# EAGLE board dongle (EAGLE 9.6.2)
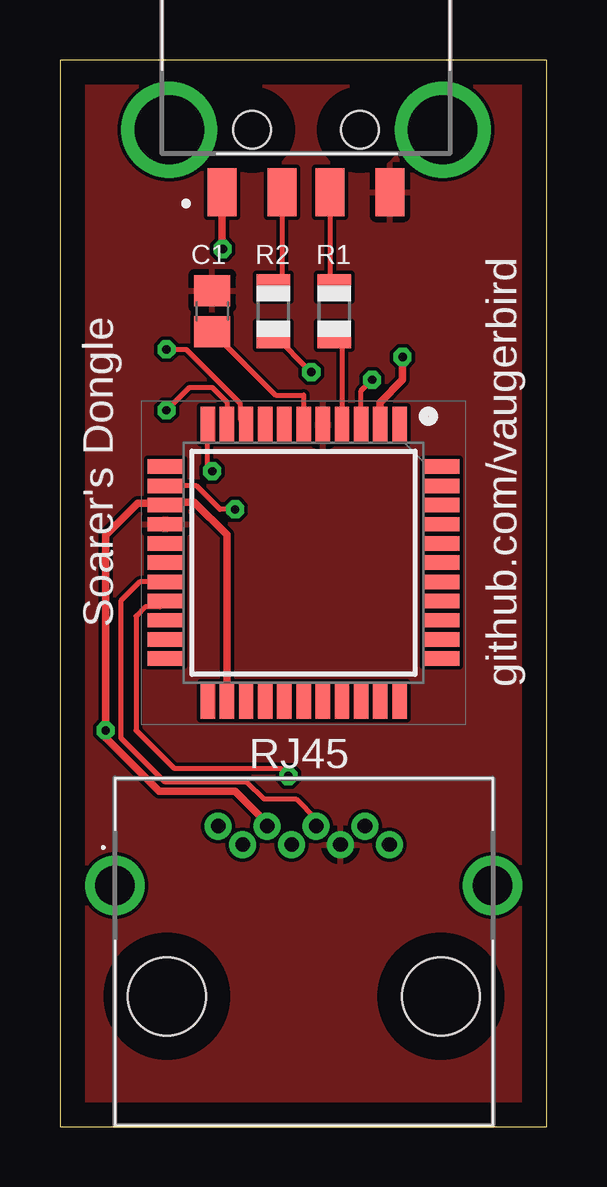
[diagram p0: board, top side]
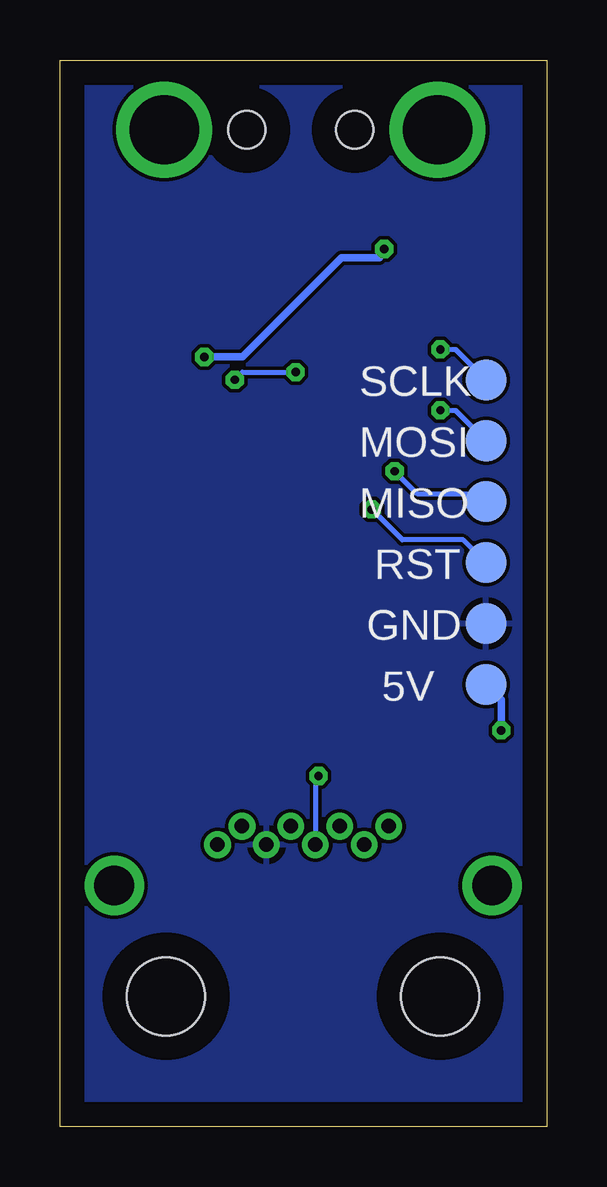
[diagram p1: board, bottom side, seen from below]

Size 20.31 x 44.44 mm. Coordinates in mm from the lower left corner, seen from the top.
Outline: 0,0 20.31,0 20.31,44.44 0,44.44 0,0
Copper layers (1*16): Top 0.035mm / dielectric 1.5mm / Bottom 0.035mm
Design rules "default": minimum track width 6mil, minimum drill 0.35mm, track to track 6mil, track to pad 6mil, pad to pad 6mil, via to via 6mil, smd to smd 6mil, copper to edge 40mil, drill to drill 6mil, minimum pad ring 10mil, minimum via ring 8mil, stop-mask expansion 4mil, vias tented up to drill 0mil, thermal gap 10mil

## Footprints (pad centres in the part's own frame; a part is rotated, then mirrored left to right if it is on the bottom)
TP17R = smd 1.7 x 1.7: TP 0,0
C0805 = smd 1.3 x 1.5: 1 -0.85,0; 2 0.85,0
QFP80P1200X1200X120-44N = smd 1.5 x 0.6: 1 -5.75,4; 2 -5.75,3.2; 3 -5.75,2.4; 4 -5.75,1.6; 5 -5.75,0.8; 6 -5.75,0; 7 -5.75,-0.8; 8 -5.75,-1.6; 9 -5.75,-2.4; 10 -5.75,-3.2; 11 -5.75,-4; 23 5.75,-4; 24 5.75,-3.2; 25 5.75,-2.4; 26 5.75,-1.6; 27 5.75,-0.8; 28 5.75,0; 29 5.75,0.8; 30 5.75,1.6; 31 5.75,2.4; 32 5.75,3.2; 33 5.75,4 | smd 0.6 x 1.5: 12 -4,-5.75; 13 -3.2,-5.75; 14 -2.4,-5.75; 15 -1.6,-5.75; 16 -0.8,-5.75; 17 0,-5.75; 18 0.8,-5.75; 19 1.6,-5.75; 20 2.4,-5.75; 21 3.2,-5.75; 22 4,-5.75; 34 4,5.75; 35 3.2,5.75; 36 2.4,5.75; 37 1.6,5.75; 38 0.8,5.75; 39 0,5.75; 40 -0.8,5.75; 41 -1.6,5.75; 42 -2.4,5.75; 43 -3.2,5.75; 44 -4,5.75
KUSBXSMT2AP5SB = smd 1.2 x 2: 1 3.5,10.125; 2 1,10.125; 3 -1,10.125; 4 -3.5,10.125 | drill 2.89 pad 4: MH1 -5.7,7.525; MH2 5.7,7.525 | hole 1.55: -2.25,7.525; 2.25,7.525
SS60300046 = drill 0.61 pad 1: 1 0,0; 2 1.02,-0.77; 3 -1.02,-0.77; 4 -3.06,-0.77; 5 -2.04,0; 6 -4.08,0; 7 -6.12,0; 8 -5.1,-0.77 | drill 1.65 pad 2.475: MH1 -10.425,1.7; MH2 5.325,1.7 | hole 3.25: 3.165,6.32; -8.265,6.32
R0805 = smd 1.1 x 1.4: 1 -1,0; 2 1,0

## Placement (x,y rotation side)
5V  TPTP17R  [TP17R]  2.54,18.41 0 bottom
C1  1uF  [C0805]  6.35,33.97 90 top
GND  TPTP17R  [TP17R]  2.54,20.95 0 bottom
IC1  ATMEGA32U4-AUR  [QFP80P1200X1200X120-44N]  10.16,23.5 270 top
J1  KUSBX-SMT2AP5S-B  [KUSBXSMT2AP5SB]  10.26,49.06 180 top
J2  SS-60300-046  [SS60300046]  7.62,11.75 180 top
MISO  TPTP17R  [TP17R]  2.54,26.04 0 bottom
MOSI  TPTP17R  [TP17R]  2.54,28.57 0 bottom
R1  22Ω  [R0805]  11.43,33.97 270 top
R2  22Ω  [R0805]  8.89,33.97 270 top
RST  TPTP17R  [TP17R]  2.54,23.5 0 bottom
SCLK  TPTP17R  [TP17R]  2.54,31.11 0 bottom

## Library data of the parts
5V GND MISO MOSI RST SCLK = testpad
C1 R1 R2 = adafruit
IC1 = SamacSys_Parts; DESCRIPTION: 8-bit Microcontrollers - MCU USB 32K Flash 16 MHz; HEIGHT: 1.2mm; MANUFACTURER_NAME: Microchip; MANUFACTURER_PART_NUMBER: ATMEGA32U4-AUR; MOUSER_PART_NUMBER: 556-ATMEGA32U4-AUR; MOUSER_PRICE-STOCK: https://www.mouser.co.uk/ProductDetail/Microchip-Technology-Atmel/ATMEGA32U4-AUR?qs=rBGENRD8NwIbVIAimLns%252BA%3D%3D
J1 = SamacSys_Parts; DESCRIPTION: USB Connectors A TYPE SMT BLK PLUG 1.35mm POSTS SHIELD; HEIGHT: 4.75mm; MANUFACTURER_NAME: Kycon; MANUFACTURER_PART_NUMBER: KUSBX-SMT2AP5S-B; MOUSER_PART_NUMBER: 806-KUSBXSMT2AP5SB; MOUSER_PRICE-STOCK: https://www.mouser.co.uk/ProductDetail/Kycon/KUSBX-SMT2AP5S-B/?qs=7zcQ9RRVJlhCJlshlB7IBQ%3D%3D
J2 = SamacSys_Parts; DESCRIPTION: Ethernet Connectors R ANG SHIELDED JACK ;SS60300046; HEIGHT: 14.33mm; MANUFACTURER_NAME: Bel; MANUFACTURER_PART_NUMBER: SS-60300-046; MOUSER_PART_NUMBER: 530-SS-60300-046

## Nets
CLK: IC1.19 J2.5
D+: J1.3 R1.1
D+RES: IC1.4 R1.2
D-: J1.2 R2.1
D-RES: IC1.3 R2.2
DATA: IC1.18 J2.4
GND: C1.2 GND.TP IC1.5 IC1.15 J1.4 J2.6
MISO: IC1.11 MISO.TP
MOSI: IC1.10 MOSI.TP
RST: IC1.13 RST.TP
SCLK: IC1.9 SCLK.TP
UCAP: C1.1 IC1.6
VCC: 5V.TP IC1.14 IC1.24 J2.3
VIN: IC1.2 J1.1

## Tracks (layer width: path | path; a pad name or v marks a point on that pad's centre or on a via)
CLK  (via drill 0.35)
  Top 0.203: IC1.19 4.16,21.65 3.56,21.65 3.17,21.27 3.17,16.51 4.76,14.92 9.21,14.92 v9.53,14.61
  Bottom 0.203: v9.53,14.61 9.66,14.47 J2.5
D+
  Top 0.203: J1.3 11.26,35.14 R1.1
D+RES
  Top 0.203: R1.2 11.76,32.64 IC1.4
D-
  Top 0.203: J1.2 9.26,35.34 R2.1
D-RES  (via drill 0.35)
  Top 0.203: IC1.3 12.56,30.66 v13.02,31.11 | v10.48,31.43 8.94,32.97 R2.2
  Bottom 0.203: v13.02,31.11 12.7,31.43 v10.48,31.43
DATA
  Top 0.203: IC1.18 3.33,22.7 2.54,21.91 2.54,16.19 4.36,14.38 7.79,14.38 8.51,13.65 9.84,13.65 10.68,12.81 J2.4
GND
  pour Top: 0,44.45 20.32,44.45 20.32,0 0,0
  pour Bottom: 0,44.45 20.32,44.45 20.32,0 0,0
MISO  (via drill 0.35)
  Top 0.203: v6.35,27.3 6.16,27.5 IC1.11
  Bottom 0.203: MISO.TP 2.86,26.35 5.4,26.35 v6.35,27.3
MOSI  (via drill 0.35)
  Top 0.203: v4.45,29.84 5.4,30.8 6.35,30.8 6.96,30.19 IC1.10
  Bottom 0.203: v4.45,29.84 3.81,29.84 MOSI.TP
RST  (via drill 0.35)
  Top 0.203: v7.3,25.72 6.67,25.72 5.69,26.7 IC1.13
  Bottom 0.203: RST.TP 3.49,24.45 6.03,24.45 v7.3,25.72
SCLK  (via drill 0.35)
  Top 0.203: IC1.9 7.51,29.49 7.51,30.14 5.26,32.38 v4.45,32.38
  Bottom 0.203: v4.45,32.38 3.81,32.38 SCLK.TP
UCAP
  Top 0.203: C1.1 8.99,30.48 10.16,30.48 IC1.6
VCC  (via drill 0.35)
  Top 0.305: J2.3 8.64,12.63 7.3,13.97 4.13,13.97 1.91,16.19 v1.91,16.51 1.91,24.63 3.24,25.97 4.34,25.97 IC1.14 4.53,26.02 5.6,26.02 6.96,24.66 IC1.24
  Bottom 0.305: v1.91,16.51 1.91,17.78 5V.TP
VIN  (via drill 0.35)
  Top 0.305: v14.29,32.07 14.29,31.11 13.34,30.16 13.34,29.27 IC1.2 | J1.1 6.76,36.6 v6.79,36.57
  Bottom 0.305: v14.29,32.07 12.7,32.07 8.57,36.2 6.99,36.2 v6.79,36.57

## Text on the board
tNames: Soarer's Dongle | github.com/vaugerbird | RJ45